# Altium PCB PCB1.PcbDoc
Units mil, origin at the board's own origin, x right, y up, seen from the top; angles counter-clockwise.
Board outline 6000 x 4000 mil, 2 copper layers (Top Layer, Bottom Layer); 56 components, 0 nets, 246 pads, 0 vias.
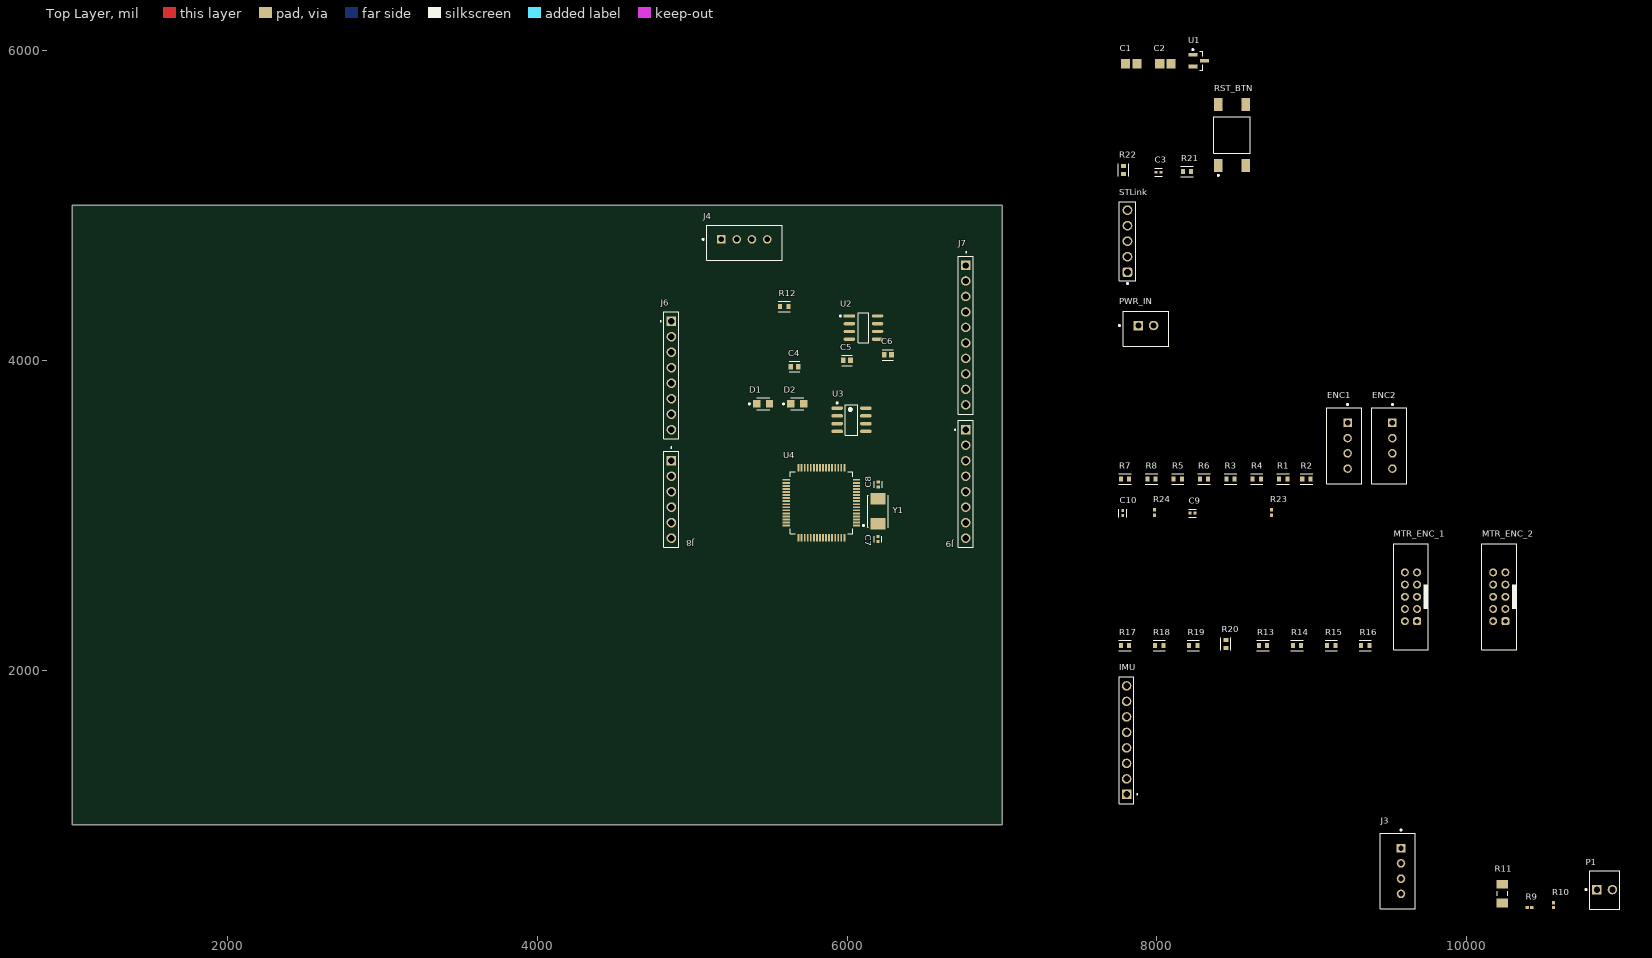
[diagram p0: Top Layer view]
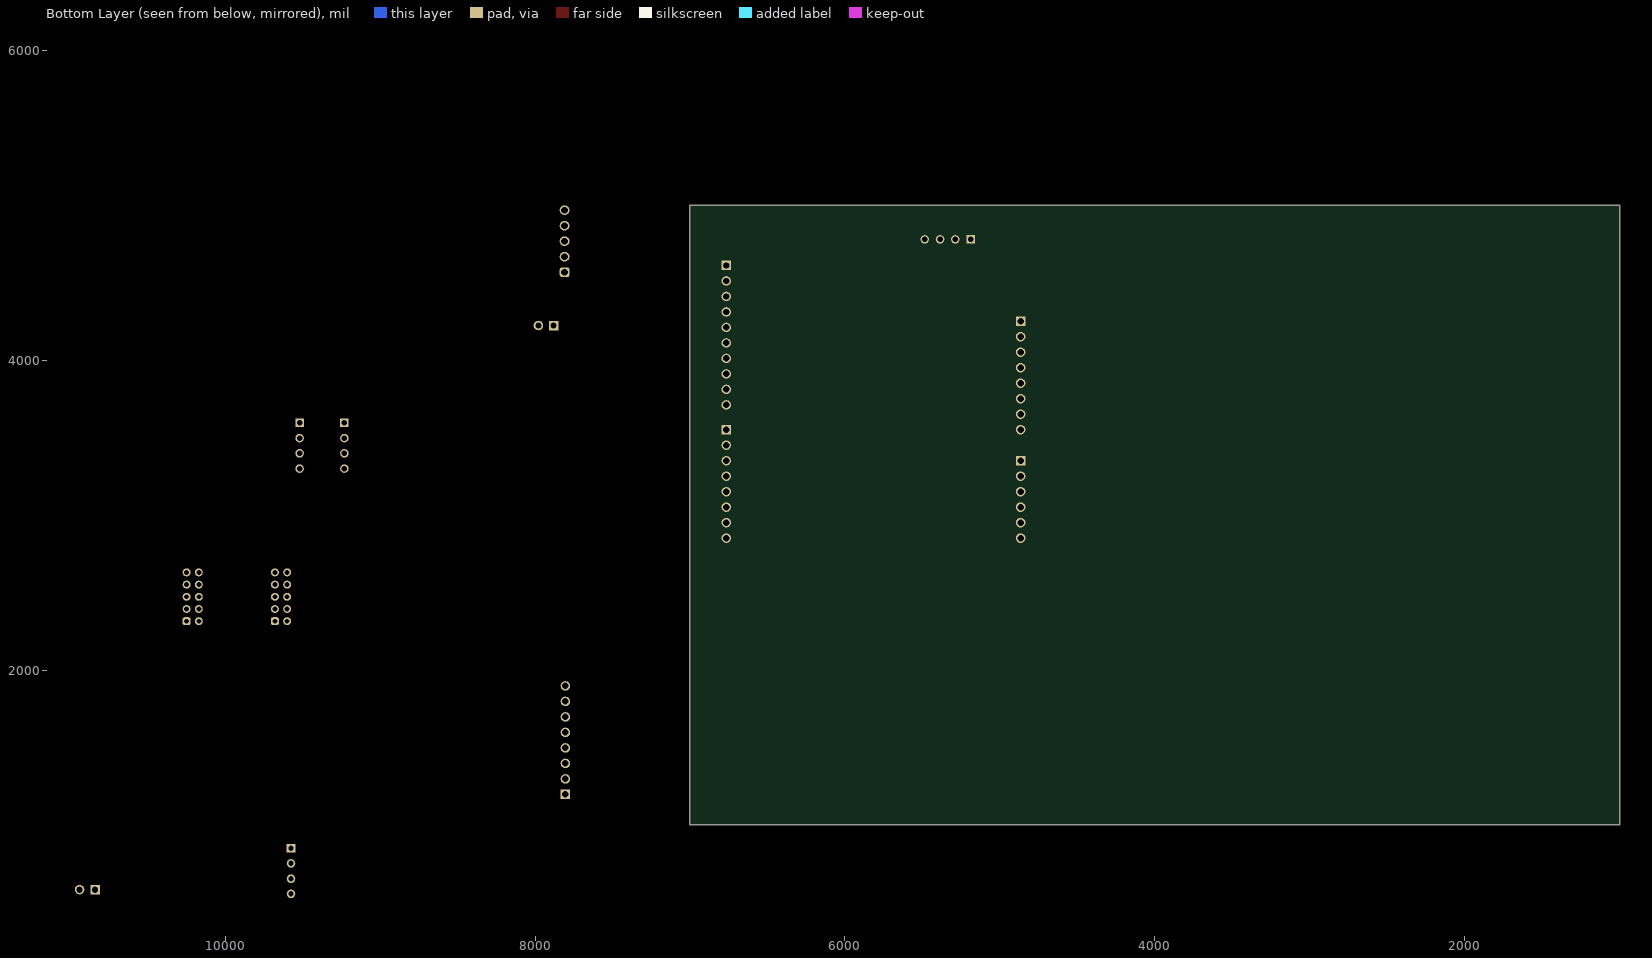
[diagram p1: Bottom Layer view, seen from below]

## Layer stack, top to bottom
Top Solder: solder mask 0.4, Solder Resist, Dk 3.5
Top Layer: signal copper 1.4
Dielectric 1: dielectric 12.6, FR-4, Dk 4.8
Bottom Layer: signal copper 1.4
Bottom Solder: solder mask 0.4, Solder Resist, Dk 3.5

## Board outline
1000,1000 7000,1000 7000,5000 1000,5000

## Design rules (kind name [scope] priority, off if disabled: settings)
Clearance [All] p1: gap=10 ignorepadtopadclearanceinfootprint=FALSE
PolygonConnect [All] p1: connectstyle=Relief reliefconductorwidth=10 reliefentries=4 polygonreliefangle="90 Angle" airgapwidth=10
RoutingVias [All] p1: holewidth=28 width=50 viastyle="Through Hole" minholewidth=28 minwidth=50 maxholewidth=28 maxwidth=50
SolderMaskExpansion [All] p1: expansion=4 istentingtop=FALSE
Width [All] p1: maxlimit=10 minlimit=10 preferedwidth=10
30 further rules are at their usual default settings.

## Components (designator, comment, footprint, x,y, rotation, side; value= is the part's Value field where it differs from the comment)
C1 "VJ0805Y105KXJTW1BC" CAPC2013X145X48ML20T23 7834.37,5912.48 r0 top
C2 "VJ0805Y105KXJTW1BC" CAPC2013X145X48ML20T23 8054.37,5912.48 r0 top
C3 "100nF" FP-0402B104K160CT-IPC_C 8009.37,5212.48 r0 top
C4 "C0603C104K8RACTU" FP-C0603C-CF-MFG 5660.38,3958 r0 top value="0.10 μF"
C5 "C0603C104K8RACTU" FP-C0603C-CF-MFG 5998.62,3998 r0 top value="0.10 μF"
C6 "C0603C104K8RACTU" FP-C0603C-CF-MFG 6263,4034 r0 top value="0.10 μF"
C7 "C0402C220J4GACAUTO" FP-C0402-BB-MFG 6200,2845 r270 top value="22 pF"
C8 "C0402C220J4GACAUTO" FP-C0402-BB-MFG 6201,3197.25 r90 top value="22 pF"
C9 "100nF" FP-0402B104K160CT-IPC_C 8229.37,3012.48 r0 top
C10 "100nF" FP-0402B104K160CT-IPC_C 7779.37,3012.48 r90 top
D1 "APHCM2012CGCK-F01" FP-APHCM2012CGCK-F01-MFG 5458.34,3718 r0 top
D2 "APHCM2012CGCK-F01" FP-APHCM2012CGCK-F01-MFG 5678.34,3718 r0 top
ENC1 "B4B-XH-A(LF)(SN)" FP-B4B-XH-A_LF_SN-MFG 9209.37,3447.48 r90 top
ENC2 "B4B-XH-A(LF)(SN)" FP-B4B-XH-A_LF_SN-MFG 9499.37,3447.48 r90 top
IMU "SSW-108-XX-X-S" SAMTEC_SSW-108-XX-X-S 7804.37,1197.48 r90 top
J3 "B4B-XH-A(LF)(SN)" FP-B4B-XH-A_LF_SN-MFG 9554.37,702.48 r90 top
J4 "B4B-XH-A(LF)(SN)" FP-B4B-XH-A_LF_SN-MFG 5337.21,4758.33 r180 top
J6 "SSW-108-XX-X-S" SAMTEC_SSW-108-XX-X-S 4866,4251 r270 top locked
J7 "SSW-110-01-XXX-S" SAMTEC_SSW-110-01-XXX-S 6766,4611 r270 top locked
J8 "SSW-106-01-X-S" SAMTEC_SSW-106-01-X-S 4866,3351 r270 top locked
J9 "SSW-108-XX-X-S" SAMTEC_SSW-108-XX-X-S 6766,3551 r270 top
MTR_ENC_1 "62501021621" 62501021621 9639.37,2472.48 r90 top
MTR_ENC_2 "62501021621" 62501021621 10209.37,2472.48 r90 top
P1 "22-23-2021" MOLX-22-23-2021_V 10889.37,582.48 r0 top
PWR_IN "B2B-XH-A(LF)(SN)" FP-B2B-XH-A_LF_SN-MFG 7929.37,4202.48 r0 top
R1 "10K" FP-RC0603-0_55-IPC_C 8814.37,3232.48 r0 top
R2 "10K" FP-RC0603-0_55-IPC_C 8964.37,3232.48 r0 top
R3 "10K" FP-RC0603-0_55-IPC_C 8474.37,3232.48 r0 top
R4 "10K" FP-RC0603-0_55-IPC_C 8644.37,3232.48 r0 top
R5 "20K" FP-RC0603-0_55-IPC_C 8134.37,3232.48 r0 top
R6 "20K" FP-RC0603-0_55-IPC_C 8304.37,3232.48 r0 top
R7 "20K" FP-RC0603-0_55-IPC_C 7794.37,3232.48 r0 top
R8 "20K" FP-RC0603-0_55-IPC_C 7964.37,3232.48 r0 top
R9 "CRCW02011K00JNED" RESC0603X28X15ML05T05 10404.37,467.48 r0 top
R10 "CRCW02011K00JNED" RESC0603X28X15ML05T05 10559.37,482.48 r90 top
R11 "RG3216P-1200-B-T5" RESC3216X50X50ML20T20 10229.37,557.48 r90 top
R12 "10K" FP-RC0603-0_55-IPC_C 5595,4345 r0 top
R13 "10K" FP-RC0603-0_55-IPC_C 8684.37,2157.48 r0 top
R14 "10K" FP-RC0603-0_55-IPC_C 8904.37,2157.48 r0 top
R15 "10K" FP-RC0603-0_55-IPC_C 9124.37,2157.48 r0 top
R16 "10K" FP-RC0603-0_55-IPC_C 9344.37,2157.48 r0 top
R17 "20K" FP-RC0603-0_55-IPC_C 7794.37,2157.48 r0 top
R18 "20K" FP-RC0603-0_55-IPC_C 8014.37,2157.48 r0 top
R19 "20K" FP-RC0603-0_55-IPC_C 8234.37,2157.48 r0 top
R20 "20K" FP-RC0603-0_55-IPC_C 8444.37,2167.48 r90 top
R21 "10k" FP-RC0603-0_55-IPC_C 8194.37,5217.48 r0 top
R22 "10k" FP-RC0603-0_55-IPC_C 7784.37,5227.48 r90 top
R23 "1k" RESC1005X40X25NL05T05 8739.37,3017.48 r90 top
R24 "1k" RESC1005X40X25NL05T05 7984.37,3017.48 r90 top
RST_BTN "1301.9316.24" FP-1301_9316_24-MFG 8484.37,5452.48 r90 top
STLink "61300511121" 61300511121 7809.37,4767.48 r90 top
U1 "MCP1700T-3302E/TT" SOT-23-TT3_N 8269.37,5932.48 r0 top
U2 "SN65HVD230QDR" FP-D0008A-IPC_C 6106,4210 r0 top
U3 "ADUM1201BRZ-RL7" ADI-R-8_L 6029,3615 r0 top
U4 "STM32F446RET6" FP-LQFP64-5W-MFG 5835,3080 r180 top
Y1 "ABM3-8.000MHZ-D2Y-T" FP-ABM3-MFG 6200,3025 r90 top

## Footprints (in the part's own frame and the unit in brackets; to place one, negate y for a bottom-side part, rotate by r counter-clockwise, add the part's x,y. Pads: shape width x height; smd on the part's side, far side on the other; paste and mask are expansions set on the pad)
61300511121 [mm] "Pin Header, pitch 2.54 mm, THT, Vertical, single row, 5p"
  rrect50% 1.6x1.6 hole 1.1: 1(-5.08,0)
  round 1.6 hole 1.1: 2(-2.54,0) 3(0,0) 4(2.54,0) 5(5.08,0)
  silkscreen extent -7.07,-1.35 6.5,1.35, body extent -6.35,-1.27 6.35,1.27, height 8.57
62501021621 [mm] "2.00mm Male Box Header, 10p"
  rrect50% 1.3x1.3 hole 0.8: 1(-4,-1)
  round 1.3 hole 0.8: 2(-4,1) 3(-2,-1) 4(-2,1) 5(0,-1) 6(0,1) 7(2,-1) 8(2,1) 9(4,-1) 10(4,1)
  silkscreen extent -8.7,-2.85 8.7,2.85, body extent -8.6,-2.75 8.6,2.75, height 5.65
ADI-R-8_L [mm] "SOIC, 8-Leads, Body 4.9x3.9mm, Pitch 1.27mm, IPC High Density"
  oval 1.9x0.6 smd: 1(-2.35,1.905) 2(-2.35,0.635) 3(-2.35,-0.635) 4(-2.35,-1.905) 5(2.35,-1.905) 6(2.35,-0.635) 7(2.35,0.635) 8(2.35,1.905)
  silkscreen extent -2.47,-2.5 1,2.88, body extent -2,-2.5 2,2.5, height 1.75
CAPC2013X145X48ML20T23 [mm] "Chip Capacitor, 2-Leads, Body 2.00x1.25mm, IPC Low Density"
  rect 1.5x1.55 smd: 1(-0.925,0) 2(0.925,0)
  body extent -1.1,-0.72 1.1,0.72, height 1.45
FP-0402B104K160CT-IPC_C [mil]
  rect 18.36x18.6 smd paste+0 mask+0: 1(-15.87,0) 2(15.87,0)
  silkscreen extent -25,-27 25,27, body extent -29,-15 29,15, height 10
FP-1301_9316_24-MFG [mm]
  rect 2.1x1.4 smd paste+0 mask+0: 1(-5,2.25) 2(5,2.25) 3(-5,-2.25) 4(5,-2.25)
  silkscreen extent -6.72,-3 3,3, body extent -6.15,-3.1 6.15,3.1, height 0.25
FP-ABM3-MFG [mm]
  rect 1.9x2.4 smd paste+0 mask+0: 1(-2.05,0) 2(2.05,0)
  silkscreen extent -2.6,-1.7 2.6,1.7, body extent -3.1,-1.8 3.1,1.8, height 0.25
FP-APHCM2012CGCK-F01-MFG [mm]
  rect 1.2x1.2 smd paste+0 mask+0: 1(-1.05,0) 2(1.05,0)
  silkscreen extent -2.37,-0.97 1.05,0.97, body extent -1.75,-0.77 1.75,0.77, height 0.25
FP-B2B-XH-A_LF_SN-MFG [mm]
  rect 1.55x1.55 hole 1 paste-2539.97 mask+0: 1(-1.25,0.525)
  round 1.55 hole 1 paste-2539.97 mask+0: 2(1.25,0.525)
  silkscreen extent -4.5,-2.88 3.7,2.88, body extent -3.8,-2.98 3.8,2.98, height 0.25
FP-B4B-XH-A_LF_SN-MFG [mm]
  rect 1.4x1.4 hole 0.9 paste-2539.97 mask+0: 1(3.75,-0.525)
  round 1.4 hole 0.9 paste-2539.97 mask+0: 2(1.25,-0.525) 3(-1.25,-0.525) 4(-3.75,-0.525)
  silkscreen extent -6.2,-2.88 6.87,2.88, body extent -6.3,-2.98 6.3,2.98, height 0.25
FP-C0402-BB-MFG [mm]
  rect 0.52x0.52 smd paste+0 mask+0: 1(-0.4,0) 2(0.4,0)
  silkscreen extent -0.5,-0.64 0.5,0.64, body extent -0.8,-0.4 0.8,0.4, height 0.25
FP-C0603C-CF-MFG [mm]
  rect 0.75x0.9 smd paste+0 mask+0: 1(-0.6,0) 2(0.6,0)
  silkscreen extent -0.87,-0.85 0.88,0.85, body extent -1.2,-0.6 1.2,0.6, height 0.25
FP-D0008A-IPC_C [mil]
  rect 73.59x21.34 smd paste+0 mask+0: 1(-91.09,75)
  rrect100% 73.59x21.34 smd paste+0 mask+0: 2(-91.09,25) 3(-91.09,-25) 4(-91.09,-75) 5(91.09,-75) 6(91.09,-25) 7(91.09,25) 8(91.09,75)
  silkscreen extent -154,-97 35,97, body extent -132,-100 132,100, height 10
FP-LQFP64-5W-MFG [mm]
  rect 1.2x0.3 smd paste+0 mask+0: 1(-5.75,3.75) 2(-5.75,3.25) 3(-5.75,2.75) 4(-5.75,2.25) 5(-5.75,1.75) 6(-5.75,1.25) 7(-5.75,0.75) 8(-5.75,0.25) 9(-5.75,-0.25) 10(-5.75,-0.75) 11(-5.75,-1.25) 12(-5.75,-1.75) 13(-5.75,-2.25) 14(-5.75,-2.75) 15(-5.75,-3.25) 16(-5.75,-3.75) 33(5.75,-3.75) 34(5.75,-3.25) 35(5.75,-2.75) 36(5.75,-2.25) 37(5.75,-1.75) 38(5.75,-1.25) 39(5.75,-0.75) 40(5.75,-0.25) 41(5.75,0.25) 42(5.75,0.75) 43(5.75,1.25) 44(5.75,1.75) 45(5.75,2.25) 46(5.75,2.75) 47(5.75,3.25) 48(5.75,3.75)
  rect 0.3x1.2 smd paste+0 mask+0: 17(-3.75,-5.75) 18(-3.25,-5.75) 19(-2.75,-5.75) 20(-2.25,-5.75) 21(-1.75,-5.75) 22(-1.25,-5.75) 23(-0.75,-5.75) 24(-0.25,-5.75) 25(0.25,-5.75) 26(0.75,-5.75) 27(1.25,-5.75) 28(1.75,-5.75) 29(2.25,-5.75) 30(2.75,-5.75) 31(3.25,-5.75) 32(3.75,-5.75) 49(3.75,5.75) 50(3.25,5.75) 51(2.75,5.75) 52(2.25,5.75) 53(1.75,5.75) 54(1.25,5.75) 55(0.75,5.75) 56(0.25,5.75) 57(-0.25,5.75) 58(-0.75,5.75) 59(-1.25,5.75) 60(-1.75,5.75) 61(-2.25,5.75) 62(-2.75,5.75) 63(-3.25,5.75) 64(-3.75,5.75)
  silkscreen extent -7.02,-5.1 5.1,5.1
FP-RC0603-0_55-IPC_C [mil]
  rect 25.93x31.97 smd paste+0 mask+0: 1(-26.64,0) 2(26.64,0)
  silkscreen extent -40,-33 40,33, body extent -44,-22 44,22, height 10
MOLX-22-23-2021_V [mm] "THD, 2-Leads, Body 6.35x4.93mm, Pitch 2.54mm"
  rect 1.55x1.55 hole 1.02: 1(-1.27,0)
  round 1.55 hole 1.02: 2(1.27,0)
  silkscreen extent -3.19,-3.25 2.46,3.1, body extent -2.46,-3.25 2.46,3.1, height 10.66
RESC0603X28X15ML05T05 [mm] "Chip Resistor, 2-Leads, Body 0.60x0.30mm, IPC Low Density"
  rect 0.55x0.45 smd: 1(-0.375,0) 2(0.375,0)
  body extent -0.33,-0.17 0.33,0.18, height 0.28
RESC1005X40X25NL05T05 [mm] "Chip Resistor, 2-Leads, Body 1.05x0.55mm, IPC Medium Density"
  rect 0.55x0.55 smd: 1(-0.45,0) 2(0.45,0)
  body extent -0.53,-0.28 0.53,0.28, height 0.4
RESC3216X50X50ML20T20 [mm] "Chip Resistor, 2-Leads, Body 3.20x1.60mm, IPC Low Density"
  rect 1.45x1.9 smd: 1(-1.525,0) 2(1.525,0)
  silkscreen extent -0.4,-0.85 0.4,0.85, body extent -1.7,-0.9 1.7,0.9, height 0.5
SAMTEC_SSW-106-01-X-S [mm]
  rect 1.56x1.56 / inner round 1.56 / far side rect 1.56x1.56 hole 1.04: 01(0,0)
  round 1.56 hole 1.04: 02(2.54,0) 03(5.08,0) 04(7.62,0) 05(10.16,0) 06(12.7,0)
  silkscreen extent -2.25,-1.2 14.23,1.2
SAMTEC_SSW-108-XX-X-S [mm]
  rect 1.56x1.56 / inner round 1.56 / far side rect 1.56x1.56 hole 1.04: 01(0,0)
  round 1.56 hole 1.04: 02(2.54,0) 03(5.08,0) 04(7.62,0) 05(10.16,0) 06(12.7,0) 07(15.24,0) 08(17.78,0)
  silkscreen extent -1.53,-1.85 19.31,1.2
SAMTEC_SSW-110-01-XXX-S [mm]
  rect 1.56x1.56 / inner round 1.56 / far side rect 1.56x1.56 hole 1.04: 01(0,0)
  round 1.56 hole 1.04: 02(2.54,0) 03(5.08,0) 04(7.62,0) 05(10.16,0) 06(12.7,0) 07(15.24,0) 08(17.78,0) 09(20.32,0) 10(22.86,0)
  silkscreen extent -2.27,-1.2 24.39,1.2
SOT-23-TT3_N [mm] "SOT23, 3-Leads, Body 2.9x1.3mm, Pitch 0.95mm, Lead Span 2.4mm, IPC Medium Density"
  rect 1.5x0.6 smd: 1(-0.95,0.95) 2(-0.95,-0.95) 3(0.95,0)
  silkscreen extent -1.07,-1.55 0.7,1.92, body extent -0.7,-1.52 0.7,1.53, height 1.12

## Part data
C1 C2: library part CMP-2007-03175-1, Manufacturer=Vitramon, Part Number=VJ0805Y105KXJTW1BC
C3 C9 C10: library part CMP-45632-000002-1, "CAP CER 0.1UF 16V X7R 0402", Case Code (Imperial)=0402, Case Code (Metric)=1005, Dielectric=X7R, Max Operating Temperature=125°C, Min Operating Temperature=-55°C, Tolerance=10%, Voltage Rating=16V, Capacitance=100nF, Case/Package=0402, Depth=0.5mm, Lead Free="Lead Free", Length=1mm, Packaging="Tape and Reel", Radiation Hardening=No, RoHS Compliant=Yes, Series=-, Voltage Rating (DC)=16V
C4 C5 C6: library part CMP-1035-02580-3, "CAP CER 0.1UF 10V X7R 0603", Capacitance="0.10 μF", Manufacturer=KEMET, Package=C0603C-CF, Temperature="-55°C to +125°C", Temperature Characteristic=X7R, Temperature Coefficient=30ppm/°C, Temperature Range High=+125°C, Temperature Range Low=-55°C, Tolerance=0.1, Voltage Rating="10 V", Automotive=Yes, Automotive Grade="Grade 1", Category=Cap, ComponentLink2Description=Datasheet, ComponentLink2URL=https://api.kemet.com/component-edge/download/datasheet/C0603C100J5GACAUTO.pdf, Device Class L1="Passive Components", Device Class L2=Capacitors, Device Class L3="Ceramic Capacitors", Digikey Description="CAP CER 0.1UF 10V X7R 0603", Height=0.87mm, Lead Free=Yes, Manufacturer Part Number=C0603C104K8RACTU, Material=Ceramic, Mouser Description="Multilayer Ceramic Capacitors MLCC - SMD/SMT 10volts 0.1uF X7R 10%", Octopart=https://octopart.com/c0603c104k8ractu-kemet-145075, RoHS=TRUE
C7 C8: library part CMP-03020-002269-1, "C0402 22 pF C0G 5.00% 16 V", Capacitance="22 pF", Manufacturer=Kemet, Package=C0402-BB, Temperature="-55°C to +125°C", Temperature Characteristic=C0G, Temperature Coefficient=15%, Temperature Range High=+125°C, Temperature Range Low=-55°C, Tolerance=0.05, Voltage Rating="16 V", Automotive=No, Category=Cap, ComponentLink2Description=Datasheet, ComponentLink2URL=https://content.kemet.com/datasheets/KEM_C1002_X7R_SMD.pdf, Device Class L1="Passive Components", Device Class L2=Capacitors, Device Class L3="Ceramic Capacitors", Height=0.55mm, Ipc Land Pattern Name=CAPC10050X50, Lead Free=Yes, Manufacturer Part Number=C0402C220J4GACAUTO, Material=Ceramic, Octopart=https://octopart.com/c0402c220j4gacauto-kemet-95437018, RoHS=TRUE
D1 D2: library part CMP-44529-000062-1, "LED GREEN CLEAR CHIP SMD", Case Code (Imperial)=0805, Case Code (Metric)=2012, Color=Green, Forward Current=20mA, Forward Voltage=2.1V, Lens Color=Clear, Max Operating Temperature=85°C, Min Operating Temperature=-40°C, Package Quantity=1, Case/Package=0805, Dominant Wavelength=570nm, Height=0.4mm, Illumination Color=Green, Lead Free="Lead Free", Length=2mm, Lens Style=Clear, Luminous Intensity=40mcd, Mount="Surface Mount", Number of LEDs=1, Number of Pins=2, Packaging="Tape and Reel", RoHS Compliant=Yes, Series=APHCM, Test Current=20mA, Viewing Angle=110°, Wavelength=570nm, Width=1.25mm
ENC1 ENC2 J3 J4: library part CMP-17439-000250-1, "CONN HEADER VERT 4POS 2.5MM", Color=Natural, Contact Resistance=20mR, Current Rating=3A, Flammability Rating="UL94 V-0", Housing Color=White, Insulation Resistance=1GR, Max Operating Temperature=85°C, Max Voltage Rating (AC)=250V, Min Operating Temperature=-25°C, Package Quantity=500, Connector Type=Header, Contact Finish - Mating=TIN, Contact Material=Brass, Contact Plating=Tin, Contact Shape=Square, Contact Type="Male Pin", Depth=5.75mm, Fastening Type=Detent, Gender=Male, Housing Material=Polyamide, Insulation Color=Natural, Insulation Material=Nylon, Lead Free="Lead Free", Lead Pitch=2.5mm, Length=12.4mm, Mated Stacking Heights=9.8mm, Material=Polyamide, Max Current Rating=3A, Max Voltage Rating (DC)=250V, Mount="Through Hole", Number of Contacts=4, Number of Positions=4, Number of Rows=1, Orientation=Straight, Packaging=Bulk, Pitch=2.5mm, REACH SVHC="No SVHC", Series=XH, Termination=Solder, Voltage Rating=250V, Voltage Rating (AC)=250V, Wire/Cable Gauge=22AWG
IMU J6 J9: "8 Position Receptacle Connector 0.100 (2.54mm) Through Hole, Right Angle Gold", Package=None, Check_prices=https://www.snapeda.com/parts/SSW-108-23-G-S/Samtec/view-part/?ref=eda, MF=Samtec, MP=SSW-108-23-G-S, SnapEDA_Link=https://www.snapeda.com/parts/SSW-108-23-G-S/Samtec/view-part/?ref=snap
J7: "SSW - Samtec 2.54mm Single Row Straight Socket Strip 8.5 Profile - Fast Stock", Package=None, Check_prices=https://www.snapeda.com/parts/SSW-110-01-F-S/Samtec+Inc./view-part/?ref=eda, MF=Samtec, MP=SSW-110-01-F-S, SnapEDA_Link=https://www.snapeda.com/parts/SSW-110-01-F-S/Samtec+Inc./view-part/?ref=snap
J8: Package=None, Availability=Unavailable, MF="Samtec Inc.", MP=SSW-106-01-X-S, Price=None
MTR_ENC_1 MTR_ENC_2: library part CMP-2000-05354-1, "Male Header, Pitch 1.27 mm, 2 x 5 Position, Height 5.96 mm, -55 to 125 degC, RoHS, Bulk", Current Rating=2A, Insulation Resistance=1GΩ, Max Operating Temperature=125°C, Min Operating Temperature=-40°C, Contact Plating=Gold, Gender=Male, Insulation Material=PBT, Length=17.2mm, Number of Pins=10, Pitch=2mm
P1: library part CMP-1704-00001-3, "Male Header, Pitch 2.54 mm, 1 x 2 Position, Height 10.67 mm, Tail Length 3.56 mm, 0 to 75 degC, RoHS, Bulk", Max Operating Temperature="75 degC", Min Operating Temperature="0 degC", Package Quantity=3000, ComponentLink1Description="Manufacturer URL", ComponentLink1URL=http://www.molex.com/, ComponentLink2Description=Datasheet, ComponentLink2URL=https://datasheet.ciiva.com/19454/232266-19454304.pdf, Height="10.67 mm", Length="5.08 mm", Mount="Through Hole", Mounting Technology="Through Hole", PackageDescription="Male Header, Pitch 2.54 mm, 1 x 2 Position, Height 10.67 mm, Tail Length 3.56 mm", Packaging=Bulk, PartNumber=22-23-2021, Pins=2, Radiation Hardening=No, REACH SVHC=Unknown, RoHSCompliant=True, Width="6.35 mm"
PWR_IN: library part CMP-2000-05888-3, "CONN HEADER VERT 2POS 2.5MM", Color=Natural, Contact Resistance=20mR, Current Rating=3A, Housing Color=White, Insulation Resistance=1GR, Max Operating Temperature=85°C, Max Voltage Rating (AC)=250V, Min Operating Temperature=-25°C, Connector Type="Male Pin", Contact Material=Brass, Contact Plating=Tin, Contact Type="Male Pin", Depth=5.75mm, Fastening Type=Detent, Housing Material=Polyamide, Lead Free="Lead Free", Lead Pitch=2.5mm, Length=7.4mm, Max Current Rating=3A, Max Voltage Rating (DC)=250V, Mount="Through Hole", Number of Contacts=2, Number of Positions=2, Number of Rows=1, Orientation=Straight, Packaging=Bulk, Pitch=2.5mm, REACH SVHC="No SVHC", Series=XH, Termination=Solder, Voltage Rating=250V, Voltage Rating (AC)=250V, Wire/Cable Gauge=22AWG
R1 R2 R3 R4 R12 R13 R14 R15 R16 R21 R22: library part CMP-2100-03664-2, "RES 10K OHM 1% 1/10W 0603", Case Code (Imperial)=0603, Case Code (Metric)=1608, Max Operating Temperature=155°C, Max Power Dissipation=100mW, Min Operating Temperature=-55°C, Resistance=10kR, Resistance Tolerance=1%, Resistor Type="Thick Film", Temperature Coefficient=100ppm/°C, Voltage Rating=75V, Voltage Rating (DC)=50V, Case/Package=0603, Construction=Rectangular, Depth=0.8mm, Features="Moisture Resistant", Height=0.45mm, Lead Free="Lead Free", Lead Pitch=0.3mm, Length=1.6mm, Military Standard=Not, Number of Pins=2, Number of Terminations=2, Packaging="Tape and Reel", Power Rating=100mW, RoHS Compliant=Yes, Series=RC, Size Code=0603, Termination=SMD/SMT, Tolerance=1%, Weight=7.1E-05oz, Width=0.8mm
R5 R6 R7 R8 R17 R18 R19 R20: library part CMP-2000-06932-2, "RES 20K OHM 1% 1/10W 0603", Case Code (Imperial)=0603, Case Code (Metric)=1608, Max Operating Temperature=155°C, Max Power Dissipation=100mW, Min Operating Temperature=-55°C, Package Quantity=1, Resistance=20kR, Resistance Tolerance=1%, Resistor Type="Thick Film", Temperature Coefficient=100ppm/°C, Voltage Rating=50V, Case/Package=0603, Construction=Rectangular, Depth=0.8mm, Features="Moisture Resistant", Height=0.022inch, Lead Free="Lead Free", Length=0.063inch, Military Standard=Not, Number of Pins=2, Number of Terminations=2, Packaging="Tape and Reel", Power Rating=100mW, REACH SVHC="No SVHC", RoHS Compliant=Yes, Series=RC, Size Code=0603, Technology="THICK FILM", Termination=SMD/SMT, Tolerance=1%, Voltage Rating (DC)=50V, Width=0.031inch
R9 R10: library part CMP-1010-00074-2, "1 KOhm", Manufacturer="Vishay Dale", Part Number=CRCW02011K00JNED
R11: library part CMP-2003-02786-1, Manufacturer=Susumu, Part Number=RG3216P-1200-B-T5
R23 R24: library part CMP-1011-00510-4, "Chip Resistor, 1 KOhm, +/- 1%, 100 mW, -55 to 155 degC, 0402 (1005 Metric), RoHS, Tape and Reel", Case Code (Imperial)=0402, Case Code (Metric)=1005, Manufacturer="Basic Passives", Max Operating Temperature="155 degC", Min Operating Temperature="-55 degC", Package Quantity=10000, PartNumber=ERJ-2RKF1001X, Power Rating="100 mW", Resistance="1 KOhm", Tolerance=1%, Voltage Rating="50 V", Case\/Package=0402, ComponentLink1Description="Manufacturer URL", ComponentLink1URL=http://www.panasonic.com/, ComponentLink2Description=Datasheet, ComponentLink2URL=http://industrial.panasonic.com/cdbs/www-data/pdf/RDA0000/AOA0000C86.pdf, DatasheetVersion=04/2015, Height="0.35 mm", Length="1 mm", Mount="Surface Mount", Mounting Technology="Surface Mount", PackageDescription="2-Pin Surface Mount Device, Body 1 x 0.5 mm", PackageReference=0402, Packaging="Tape and Reel", Pins=2, Radiation Hardening=No, REACH SVHC=Yes, RoHSCompliant=true, Width="0.5 mm"
RST_BTN: library part CMP-26321-000004-1, "LSH 6X6 SHORT TRAVEL SWITCH 7.00", Case/Package=SMD/SMT, Max Current Rating=50mA, Max Operating Temperature=70°C, Max Voltage Rating (DC)=12V, Min Operating Temperature=-20°C, Operating Force=1.6N, Depth=10mm, Length=6mm, Mechanical Life=100000Cycles, Mount="Surface Mount", Orientation=Straight, Packaging="Tape and Reel", Radiation Hardening=No, RoHS Compliant=Yes, Termination="Gull Wing", Throw Configuration=SPST, Voltage Rating (DC)=12V
STLink: library part CMP-1502-01068-4, "THT Vertical Pin Header WR-PHD, Pitch 2.54 mm, Single Row, 5 pins", Color=Black, Contact Resistance=20mΩ, Current Rating=3A, Max Operating Temperature=105°C, Min Operating Temperature=-40°C, Operating Supply Voltage=250V, Connector Type="Male Pin", Contact Material=Gold, Contact Mating Length=5.9944mm, Contact Plating=Gold, Gender=Male, Height=8.89mm, Lead Free="Lead Free", Lead Pitch=2.54mm, Mount="Through Hole", Number of Contacts=5, Number of Pins=5, Number of Positions=5, Number of Rows=1, Orientation=Vertical, Packaging=Bulk, Pitch=2.54mm, RoHS=Compliant, Termination=Solder, Voltage Rating=250V
U1: library part CMP-0136-00791-1, "Low Quiescent Current LDO, 3-Pin SOT-23, Extended Temperature, Tape and Reel", Code_IPC=SOT23-3, DatasheetVersion="revB, Feb-2007", PackageDescription="3-Lead Plastic Small Outline Transistor (TT) [SOT-23]", PackageReference=SOT-23-TT3, PackageVersion="revBB, Aug-2009"
U2: library part CMP-0315-00033-3, "IC TRANSCEIVER HALF 1/1 8SOIC", Case/Package=D, Max Operating Temperature=125°C, Max Supply Current=17mA, Max Supply Voltage=3.6V, Min Operating Temperature=-40°C, Min Supply Voltage=3V, Operating Supply Voltage=3.3V, Package Quantity=2500, Contact Plating=Gold, Data Rate=1Mbps, Lead Free="Lead Free", Nominal Supply Current=17mA, Number of Drivers=1, Number of Pins=8, Number of Receivers=1, Number of Transceivers=1, Packaging="Tape and Reel", Radiation Hardening=No, Receiver Hysteresis=100mV, RoHS Compliant=Yes, Simplex/Duplex="Half Duplex", Weight=0.002822oz
U3: library part CMP-0534-00027-1, "Dual Channel Digital Isolator, 2.5 KV rms Insulation Rating, 10 Mbps Data Rate, 50 ns Delay, Industrial, 8-pin SOIC (R-8), Reel", Insulation Rating (kVrms)=2.5, Manufacturer="Analog Devices", Max Operating Temp (degreesC)=125, Code_JEDEC=MS-012-AA, ComponentLink1Description="Manufacturer URL", ComponentLink1URL=http://www.analog.com/en/index.html, ComponentLink2Description=Datasheet, ComponentLink2URL=http://www.analog.com/static/imported-files/data_sheets/ADuM1200_1201.pdf, ComponentLink3Description="Package Specification", ComponentLink3URL=http://www.analog.com/static/imported-files/packages/PKG_PDF/SOIC_Narrow%20(R)/R_8.pdf, ComponentLink4Description="URL Link1", ComponentLink4URL="Product URL:http://www.analog.com/en/interface-isolation/digital-isolators/adum1201/products/product.html", ComponentLink5Description="URL Link2", ComponentLink5URL="Reference Circuit:http://www.analog.com/en/interface-isolation/digital-isolators/adum1201/products/product.html#product-recommendations", DatasheetVersion="Rev. I", Max Data Rate=10Mbps, Mounting Technology="Surface Mount", PackageDescription="8-Pin Standard Small Outline Package, Body 4.9 x 3.9 mm, Pitch 1.27 mm", PackageReference=R-8, PackageVersion="060506-A, 06/2006", PartNumber=ADUM1201BRZ-RL7
U4: library part CMP-12105-000007-1, "IC MCU 32BIT 512KB FLASH 64LQFP", Ambient Temperature Range High=+85°C, Ambient Temperature Range Low=-40°C, Frequency=180MHz, Manufacturer=ST, Max Junction Temp=+105°C, Max Supply Voltage=3.6V, Min Supply Voltage=1.7V, Package=LQFP64-5W, Temperature="-40°C to +105°C", Automotive=No, Category=IC, ComponentLink2Description=Datasheet, ComponentLink2URL=https://www.st.com/en/microcontrollers-microprocessors/stm32f446re.html, Core Architecture="ARM Cortex-M4", Data Bus Width=32bits, Device Class L1="Integrated Circuits (ICs)", Device Class L2="Embedded Processors and Controllers", Device Class L3=Microcontrollers, Digikey Description="IC MCU 32BIT 512KB FLASH 64LQFP", Height=1.6mm, Interface=I2C,SPI,UART,USART,CAN,USB,LIN,IrDA,I2S,Other, Ipc Land Pattern Name=QFP50P1200X1200X160-64, Lead Free=Yes, Manufacturer Part Number=STM32F446RET6, Memory Size=512KBytes, Memory Type=FLASH, Mouser Description="ARM Microcontrollers - MCU High-performance and DSP with FP, ARM Cortex-M4 MCU with 512 Kbytes Flash, 180 MHz CPU, Art Accelerator, SDRAM", Number Of A/D Converters=3, Number Of Adc Channels=16, Number Of Cores=1, Number Of I2C Channels=4, Number Of I/Os=50, Number Of Pwm Channels=32, Number Of Spi Channels=4, Number Of Timers/Counters=14, Number Of Uart Channels=6, Number Of Usb Channels=2, Octopart=https://octopart.com/stm32f446ret6-stmicroelectronics-52642920, Ram Size=128KBytes, RoHS=TRUE, Standoff Height=0.05mm, Temperature Range High=+105°C, Temperature Range Low=-40°C
Y1: library part CMP-2000-05033-2, "Crystal 8MHz ±20ppm 18pF SMD-2 5mm x 3.2mm", Case/Package=CSMD, ESR (Equivalent Series Resistance)=140R, Frequency=8MHz, Frequency Stability=30ppm, Frequency Tolerance=20ppm, Load Capacitance=18pF, Max Operating Temperature=85°C, Min Operating Temperature=-40°C, Package Quantity=1000, Resistor Type=Ceramic, Series Resistance=500R, Depth=3.2mm, Height=0.051inch, Lead Free="Lead Free", Length=5mm, Mount="Surface Mount", Number of Pins=2, Packaging="Tape and Reel", Radiation Hardening=No, RoHS Compliant=Yes, Termination=SMD/SMT, Tolerance=20ppm, Width=3.2mm

## Nets (pads, with @x,y where several pads share a name; then routed paths per layer and width w, separated by ;. In a path a pad name is that pad's centre, name@x,y a point inside that pad or via, vN(x,y) a via of type N, cw(c..) or ccw(c..) an arc to the next point about the centre after c; other vN are vias at no path point)
pads on no net: C1.1 C1.2 C2.1 C2.2 C3.1 C3.2 C4.1 C4.2 C5.1 C5.2 C6.1 C6.2 C7.1 C7.2 C8.1 C8.2 C9.1 C9.2 C10.1 C10.2 D1.1 D1.2 D2.1 D2.2 ENC1.1 ENC1.2 ENC1.3 ENC1.4 ENC2.1 ENC2.2 ENC2.3 ENC2.4 IMU.01 IMU.02 IMU.03 IMU.04 IMU.05 IMU.06 IMU.07 IMU.08 J3.1 J3.2 J3.3 J3.4 J4.1 J4.2 J4.3 J4.4 J6.01 J6.02 J6.03 J6.04 J6.05 J6.06 J6.07 J6.08 J7.01 J7.02 J7.03 J7.04 J7.05 J7.06 J7.07 J7.08 J7.09 J7.10 J8.01 J8.02 J8.03 J8.04 J8.05 J8.06 J9.01 J9.02 J9.03 J9.04 J9.05 J9.06 J9.07 J9.08 MTR_ENC_1.1 MTR_ENC_1.2 MTR_ENC_1.3 MTR_ENC_1.4 MTR_ENC_1.5 MTR_ENC_1.6 MTR_ENC_1.7 MTR_ENC_1.8 MTR_ENC_1.9 MTR_ENC_1.10 MTR_ENC_2.1 MTR_ENC_2.2 MTR_ENC_2.3 MTR_ENC_2.4 MTR_ENC_2.5 MTR_ENC_2.6 MTR_ENC_2.7 MTR_ENC_2.8 MTR_ENC_2.9 MTR_ENC_2.10 P1.1 P1.2 PWR_IN.1 PWR_IN.2 R1.1 R1.2 R2.1 R2.2 R3.1 R3.2 R4.1 R4.2 R5.1 R5.2 R6.1 R6.2 R7.1 R7.2 R8.1 R8.2 R9.1 R9.2 R10.1 R10.2 R11.1 R11.2 R12.1 R12.2 R13.1 R13.2 R14.1 R14.2 R15.1 R15.2 R16.1 R16.2 R17.1 R17.2 R18.1 R18.2 R19.1 R19.2 R20.1 R20.2 R21.1 R21.2 R22.1 R22.2 R23.1 R23.2 R24.1 R24.2 RST_BTN.1 RST_BTN.2 RST_BTN.3 RST_BTN.4 STLink.1 STLink.2 STLink.3 STLink.4 STLink.5 U1.1 U1.2 U1.3 U2.1 U2.2 U2.3 U2.4 U2.5 U2.6 U2.7 U2.8 U3.1 U3.2 U3.3 U3.4 U3.5 U3.6 U3.7 U3.8 U4.1 U4.2 U4.3 U4.4 U4.5 U4.6 U4.7 U4.8 U4.9 U4.10 U4.11 U4.12 U4.13 U4.14 U4.15 U4.16 U4.17 U4.18 U4.19 U4.20 U4.21 U4.22 U4.23 U4.24 U4.25 U4.26 U4.27 U4.28 U4.29 U4.30 U4.31 U4.32 U4.33 U4.34 U4.35 U4.36 U4.37 U4.38 U4.39 U4.40 U4.41 U4.42 U4.43 U4.44 U4.45 U4.46 U4.47 U4.48 U4.49 U4.50 U4.51 U4.52 U4.53 U4.54 U4.55 U4.56 U4.57 U4.58 U4.59 U4.60 U4.61 U4.62 U4.63 U4.64 Y1.1 Y1.2